# EAGLE board sensor (EAGLE 7.5.0)
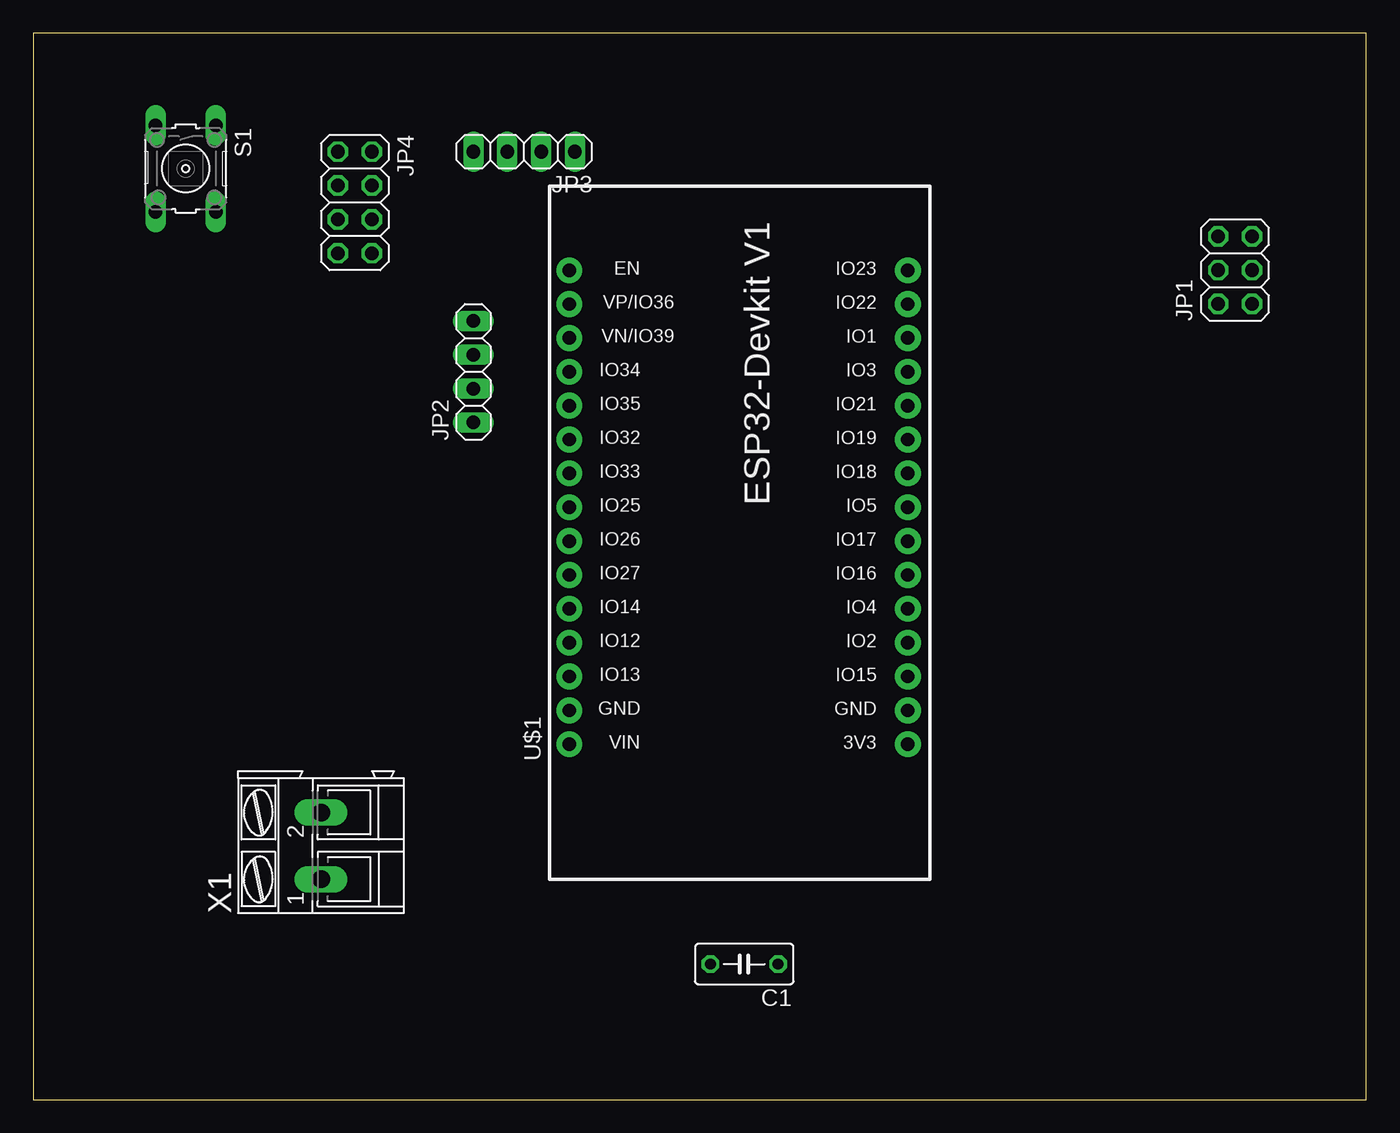
[diagram p0: board, top side]
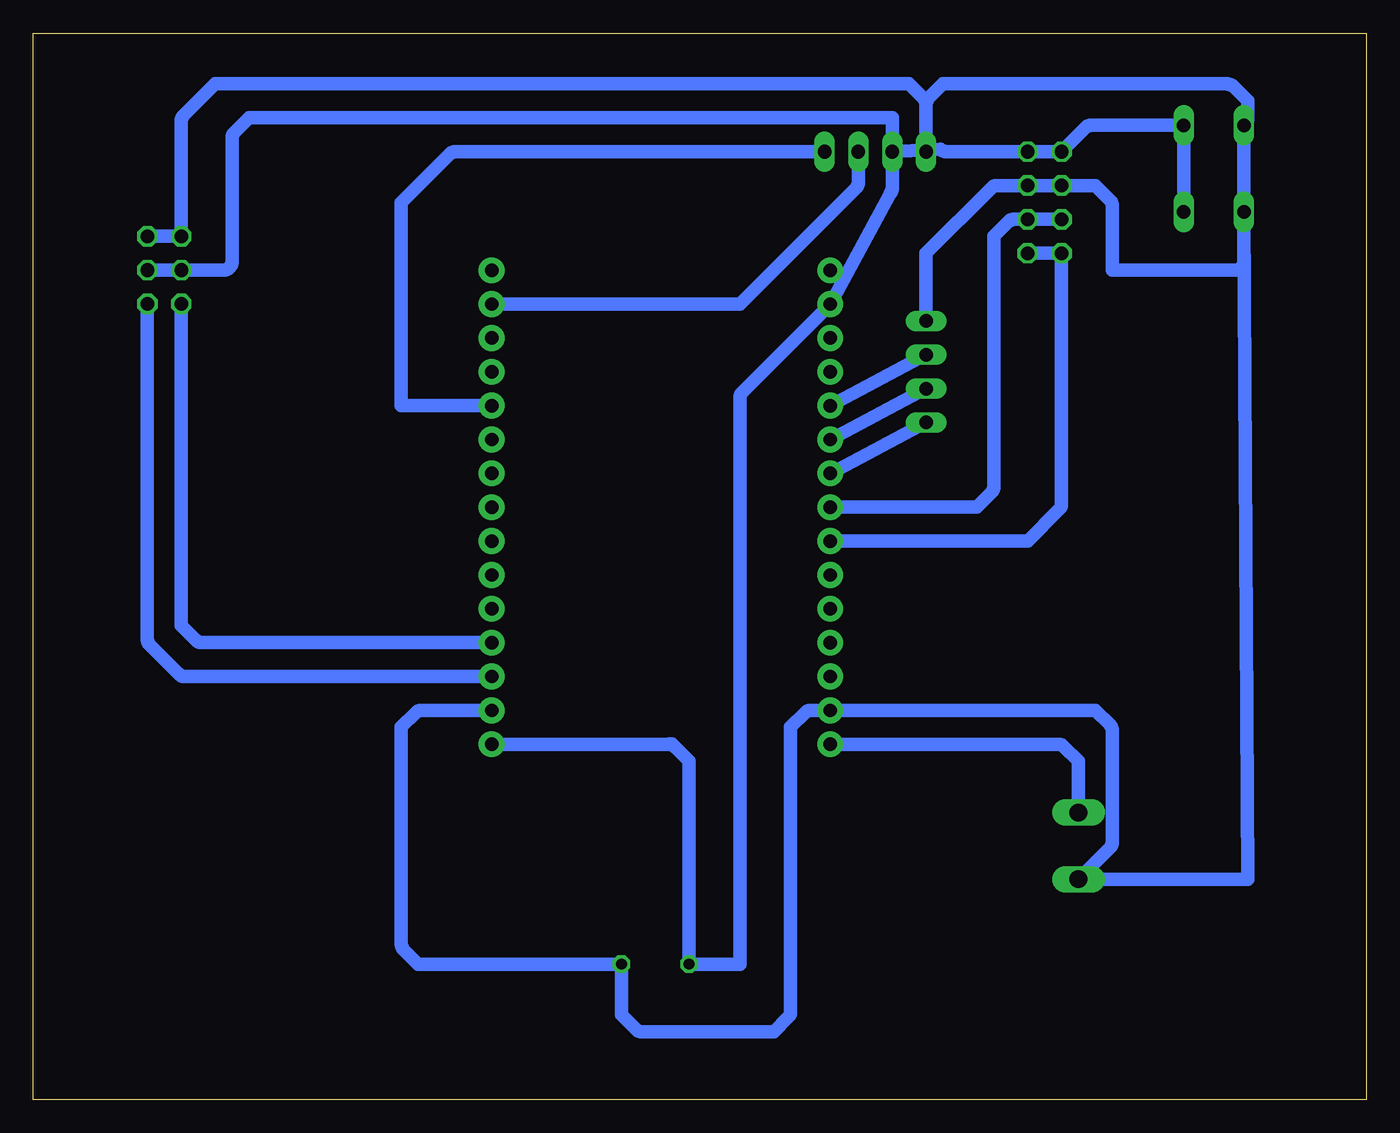
[diagram p1: board, bottom side, seen from below]

Size 100 x 80 mm. Coordinates in mm from the lower left corner, seen from the top.
Outline: 0,0 100,0 100,80 0,80 0,0
Copper layers (1*16): Top 0.035mm / dielectric 1.5mm / Bottom 0.035mm
Design rules "default": minimum track width 10mil, minimum drill 24mil, track to track 8mil, track to pad 8mil, pad to pad 8mil, via to via 8mil, smd to smd 8mil, copper to edge 40mil, drill to drill 8mil, minimum pad ring 10mil, minimum via ring 8mil, stop-mask expansion 4mil, vias tented up to drill 0mil, thermal gap 10mil

## Footprints (pad centres in the part's own frame; a part is rotated, then mirrored left to right if it is on the bottom)
C050-030X075 = drill 0.813 octagon: 1 -2.54,0; 2 2.54,0
2X03 = drill 1.016 octagon: 1 -2.54,-1.27; 2 -2.54,1.27; 3 0,-1.27; 4 0,1.27; 5 2.54,-1.27; 6 2.54,1.27
1X04 = drill 1.016 long: 1 -3.81,0; 2 -1.27,0; 3 1.27,0; 4 3.81,0
2X04 = drill 1.016 octagon: 1 -3.81,-1.27; 2 -3.81,1.27; 3 -1.27,-1.27; 4 -1.27,1.27; 5 1.27,-1.27; 6 1.27,1.27; 7 3.81,-1.27; 8 3.81,1.27
B3F-10XX = drill 1.016 long: 1 -3.251,2.261; 2 3.251,2.261; 3 -3.251,-2.261; 4 3.251,-2.261
ESP32-DEVKITV1 = drill 1 pad 1.93: 3V3 -16.52,-12.27; D1 13.96,-12.27; D2 -8.9,-12.27; D3 11.42,-12.27; D4 -6.36,-12.27; D5 1.26,-12.27; D12 -8.9,13.135; D13 -11.44,13.135; D14 -6.36,13.135; D15 -11.44,-12.27; D16 -3.82,-12.27; D17 -1.28,-12.27; D18 3.8,-12.27; D19 6.34,-12.27; D21 8.88,-12.27; D22 16.5,-12.27; D23 19.04,-12.27; D25 1.26,13.135; D26 -1.28,13.135; D27 -3.82,13.135; D32 6.34,13.135; D33 3.8,13.135; D34 11.42,13.135; D35 8.88,13.135; D36 16.5,13.135; D39 13.96,13.135; EN 19.04,13.135; GND@1 -13.98,13.135; GND@2 -13.98,-12.27; VIN -16.52,13.135
AK300/2 = drill 1.321 long: 1 -2.515,0; 2 2.489,0

## Placement (x,y rotation side)
C1  [C050-030X075]  53.34,10.16 180 top
JP1  [2X03]  90.17,62.23 90 top
JP2  [1X04]  33.02,54.61 90 top
JP3  [1X04]  36.83,71.12 180 top
JP4  [2X04]  24.13,67.31 270 top
S1  [B3F-10XX]  11.43,69.85 270 top
U$1  ESP32DEVKITV1  [ESP32-DEVKITV1]  53.34,43.18 90 top
X1  [AK300/2]  21.59,19.05 90 top

## Library data of the parts
C1 = rcl; SPICEPREFIX: C
JP1-JP4 = pinhead
S1 = switch-omron; MPN: B3F-1000; OC_FARNELL: 176432; OC_NEWARK: 36M3542
U$1 = esp32-devkitv1
X1 = con-ptr500; OC_FARNELL: unknown; OC_NEWARK: unknown

## Nets
GND: C1.1 JP1.5 JP1.6 JP2.4 JP3.4 JP4.3 JP4.4 S1.3 S1.4 U$1.GND@1 U$1.GND@2 X1.1
MOISTURE: JP1.2 U$1.D2
OUT1: JP2.1 U$1.D33
OUT2: JP2.2 U$1.D32
OUT3: JP2.3 U$1.D35
PH: JP1.1 U$1.D15
SCL: JP3.2 U$1.D22
SCL2: JP4.5 JP4.6 U$1.D25
SDA: JP3.1 U$1.D21
SDA2: JP4.7 JP4.8 U$1.D26
V: C1.2 JP1.3 JP1.4 JP3.3 JP4.1 JP4.2 S1.1 S1.2 U$1.3V3 U$1.D36
VIN: U$1.VIN X1.2

## Tracks (layer width: path | path; a pad name or v marks a point on that pad's centre or on a via)
GND
  Bottom 1.016: S1.4 S1.3 9.08,73.19 arc-45 8.89,73.64 8.89,74.93 9.97,76.01 arc-45 10.42,76.2 31.75,76.2 32.83,75.12 arc-45 33.02,74.67 | S1.4 8.89,16.51 arc-45 8.95,16.54 X1.1 19.24,18.89 arc-45 19.05,19.34 19.05,27.68 arc-45 19.24,28.13 20.32,29.21 40.18,29.21 arc-45 U$1.GND@1 41.66,29.2 arc-45 42.11,29.01 43.18,27.94 43.18,6.61 arc45 43.37,6.16 44.45,5.08 54.35,5.08 arc45 54.8,5.27 55.88,6.35 C1.1 71.12,10.16 72.2,11.24 arc45 72.39,11.69 72.39,27.94 71.32,29.01 arc45 70.87,29.2 U$1.GND@2 | JP1.5 JP1.6 88.9,73.4 arc45 88.71,73.85 86.36,76.2 34.29,76.2 33.21,75.12 arc45 33.02,74.67 | S1.4 9.17,62.87 arc90 9.8,62.23 19.05,62.23 19.05,67.05 arc-45 19.24,67.5 20.32,68.58 JP4.3 JP4.4 27.68,68.58 arc-45 28.13,68.39 33.02,63.5 JP2.4 | 33.02,74.67 JP3.4
MOISTURE
  Bottom 1.016: U$1.D2 87.36,34.28 arc45 87.81,34.47 88.9,35.56 JP1.2
OUT1
  Bottom 1.016: JP2.1 U$1.D33
OUT2
  Bottom 1.016: JP2.2 U$1.D32
OUT3
  Bottom 1.016: JP2.3 U$1.D35
PH
  Bottom 1.016: JP1.1 91.44,34.55 arc-45 91.25,34.1 89.08,31.93 arc-45 88.63,31.74 U$1.D15
SCL
  Bottom 1.016: JP3.2 38.1,68.84 arc45 38.29,68.39 46.99,59.69 65.59,59.69 arc-45 U$1.D22
SCL2
  Bottom 1.016: JP4.5 JP4.6 26.41,66.04 arc-45 26.86,65.85 27.94,64.77 27.94,45.98 arc45 28.13,45.53 29.21,44.45 40.18,44.45 arc-45 U$1.D25
SDA
  Bottom 1.016: JP3.1 68.32,71.12 arc-45 68.77,70.93 72.39,67.31 72.39,52.07 65.63,52.07 arc45 U$1.D21
SDA2
  Bottom 1.016: JP4.8 JP4.7 22.86,44.71 arc45 23.05,44.26 25.4,41.91 40.18,41.91 arc-45 U$1.D26
V
  Bottom 1.016: JP1.3 JP1.4 85.72,62.23 arc-90 85.09,62.87 85.09,72.13 arc45 84.9,72.58 83.82,73.66 35.56,73.66 JP3.3 | JP3.3 35.56,68.4 arc45 35.75,67.95 U$1.D36 46.8,53.08 arc-45 46.99,52.63 46.99,10.16 C1.2 50.8,25.4 51.87,26.47 arc-45 52.32,26.66 | S1.2 S1.1 20.62,73.1 arc-45 21.07,72.92 JP4.1 JP4.2 31.49,71.12 arc45 31.94,71.31 JP3.3 | U$1.3V3 52.32,26.66 | 52.32,26.66 52.09,26.66 arc-45 52.07,26.67 52.3,26.67 arc-45 52.32,26.66
VIN
  Bottom 1.016: U$1.VIN 23.11,26.66 arc45 22.66,26.47 21.59,25.4 X1.2